# EAGLE board medi_charlie_10x10_with_header_groudplane (EAGLE 6.2)

Size 76.2 x 76.2 mm. Coordinates in mm from the lower left corner, seen from the top.
Outline: 0,0 0,76.2 76.2,76.2 76.2,0 0,0
Copper layers (1*16): Top 0.035mm / dielectric 1.5mm / Bottom 0.035mm
Design rules: minimum track width 10mil, minimum drill 20mil, track to track 8mil, track to pad 8mil, pad to pad 8mil, via to via 8mil, smd to smd 8mil, copper to edge 10mil, drill to drill 8mil, minimum pad ring 12mil, minimum via ring 10mil, stop-mask expansion 4mil, vias tented up to drill 25mil, thermal gap 10mil
Holes 3.2 mm at 7.62,7.62 7.62,68.58 68.58,7.62 68.58,68.58

## Footprints (pad centres in the part's own frame; a part is rotated, then mirrored left to right if it is on the bottom)
LED3MM = drill 0.813 pad 1.88: A -1.27,0; K 1.27,0
DIL20 = drill 0.813 long: 1 -11.43,-3.81; 2 -8.89,-3.81; 3 -6.35,-3.81; 4 -3.81,-3.81; 5 -1.27,-3.81; 6 1.27,-3.81; 7 3.81,-3.81; 8 6.35,-3.81; 9 8.89,-3.81; 10 11.43,-3.81; 11 11.43,3.81; 12 8.89,3.81; 13 6.35,3.81; 14 3.81,3.81; 15 1.27,3.81; 16 -1.27,3.81; 17 -3.81,3.81; 18 -6.35,3.81; 19 -8.89,3.81; 20 -11.43,3.81
1X06_LOCK = drill 1.016 pad 1.88: 1 0,0; 2 2.54,-0.254; 3 5.08,0; 4 7.62,-0.254; 5 10.16,0; 6 12.7,-0.254
R-5 = drill 0.813 pad 1.6 octagon: 1 -2.54,0; 2 2.54,0
C025-025X050 = drill 0.813 octagon: 1 -1.27,0; 2 1.27,0
SOIC14 = smd 0.61 x 2.21: 1 -3.81,-2.603; 2 -2.54,-2.603; 3 -1.27,-2.603; 4 0,-2.603; 5 1.27,-2.603; 6 2.54,-2.603; 7 3.81,-2.603; 8 3.81,2.603; 9 2.54,2.603; 10 1.27,2.603; 11 0,2.603; 12 -1.27,2.603; 13 -2.54,2.603; 14 -3.81,2.603
DIL14 = drill 0.813 long: 1 -7.62,-3.81; 2 -5.08,-3.81; 3 -2.54,-3.81; 4 0,-3.81; 5 2.54,-3.81; 6 5.08,-3.81; 7 7.62,-3.81; 8 7.62,3.81; 9 5.08,3.81; 10 2.54,3.81; 11 0,3.81; 12 -2.54,3.81; 13 -5.08,3.81; 14 -7.62,3.81
SOIC20S = smd 0.6 x 1.5: 1 -5.715,-5; 2 -4.445,-5; 3 -3.175,-5; 4 -1.905,-5; 5 -0.635,-5; 6 0.635,-5; 7 1.905,-5; 8 3.175,-5; 9 4.445,-5; 10 5.715,-5; 11 5.715,5; 12 4.445,5; 13 3.175,5; 14 1.905,5; 15 0.635,5; 16 -0.635,5; 17 -1.905,5; 18 -3.175,5; 19 -4.445,5; 20 -5.715,5
DIL28-3 = drill 0.813 long: 1 -16.51,-3.81; 2 -13.97,-3.81; 3 -11.43,-3.81; 4 -8.89,-3.81; 5 -6.35,-3.81; 6 -3.81,-3.81; 7 -1.27,-3.81; 8 1.27,-3.81; 9 3.81,-3.81; 10 6.35,-3.81; 11 8.89,-3.81; 12 11.43,-3.81; 13 13.97,-3.81; 14 16.51,-3.81; 15 16.51,3.81; 16 13.97,3.81; 17 11.43,3.81; 18 8.89,3.81; 19 6.35,3.81; 20 3.81,3.81; 21 1.27,3.81; 22 -1.27,3.81; 23 -3.81,3.81; 24 -6.35,3.81; 25 -8.89,3.81; 26 -11.43,3.81; 27 -13.97,3.81; 28 -16.51,3.81
1X02_LONGPADS = drill 1.016 pad 1.88 long: 1 0,0; 2 2.54,0
1X02 = drill 1.016 pad 1.88: 1 0,0; 2 2.54,0
1X11_LOCK = drill 1.016 pad 1.88: 1 0,0.127; 2 2.54,-0.127; 3 5.08,0.127; 4 7.62,-0.127; 5 10.16,0.127; 6 12.7,-0.127; 7 15.24,0.127; 8 17.78,-0.127; 9 20.32,0.127; 10 22.86,-0.127; 11 25.4,0.127

## Placement (x,y rotation side)
00  [LED3MM]  3.81,3.81 0 top
01  [LED3MM]  11.43,3.81 0 top
02  [LED3MM]  19.05,3.81 0 top
03  [LED3MM]  26.67,3.81 0 top
04  [LED3MM]  34.29,3.81 0 top
05  [LED3MM]  41.91,3.81 0 top
06  [LED3MM]  49.53,3.81 0 top
07  [LED3MM]  57.15,3.81 0 top
08  [LED3MM]  64.77,3.81 0 top
09  [LED3MM]  72.39,3.81 0 top
10  [LED3MM]  3.81,11.43 0 top
11  [LED3MM]  11.43,11.43 0 top
12  [LED3MM]  19.05,11.43 0 top
13  [LED3MM]  26.67,11.43 0 top
14  [LED3MM]  34.29,11.43 0 top
15  [LED3MM]  41.91,11.43 0 top
16  [LED3MM]  49.53,11.43 0 top
17  [LED3MM]  57.15,11.43 0 top
18  [LED3MM]  64.77,11.43 0 top
19  [LED3MM]  72.39,11.43 0 top
20  [LED3MM]  3.81,19.05 0 top
21  [LED3MM]  11.43,19.05 0 top
22  [LED3MM]  19.05,19.05 0 top
23  [LED3MM]  26.67,19.05 0 top
24  [LED3MM]  34.29,19.05 0 top
25  [LED3MM]  41.91,19.05 0 top
26  [LED3MM]  49.53,19.05 0 top
27  [LED3MM]  57.15,19.05 0 top
28  [LED3MM]  64.77,19.05 0 top
29  [LED3MM]  72.39,19.05 0 top
30  [LED3MM]  3.81,26.67 0 top
31  [LED3MM]  11.43,26.67 0 top
32  [LED3MM]  19.05,26.67 0 top
33  [LED3MM]  26.67,26.67 0 top
34  [LED3MM]  34.29,26.67 0 top
35  [LED3MM]  41.91,26.67 0 top
36  [LED3MM]  49.53,26.67 0 top
37  [LED3MM]  57.15,26.67 0 top
38  [LED3MM]  64.77,26.67 0 top
39  [LED3MM]  72.39,26.67 0 top
40  [LED3MM]  3.81,34.29 0 top
41  [LED3MM]  11.43,34.29 0 top
42  [LED3MM]  19.05,34.29 0 top
43  [LED3MM]  26.67,34.29 0 top
44  [LED3MM]  34.29,34.29 0 top
45  [LED3MM]  41.91,34.29 0 top
46  [LED3MM]  49.53,34.29 0 top
47  [LED3MM]  57.15,34.29 0 top
48  [LED3MM]  64.77,34.29 0 top
49  [LED3MM]  72.39,34.29 0 top
50  [LED3MM]  3.81,41.91 0 top
51  [LED3MM]  11.43,41.91 0 top
52  [LED3MM]  19.05,41.91 0 top
53  [LED3MM]  26.67,41.91 0 top
54  [LED3MM]  34.29,41.91 0 top
55  [LED3MM]  41.91,41.91 0 top
56  [LED3MM]  49.53,41.91 0 top
57  [LED3MM]  57.15,41.91 0 top
58  [LED3MM]  64.77,41.91 0 top
59  [LED3MM]  72.39,41.91 0 top
60  [LED3MM]  3.81,49.53 0 top
61  [LED3MM]  11.43,49.53 0 top
62  [LED3MM]  19.05,49.53 0 top
63  [LED3MM]  26.67,49.53 0 top
64  [LED3MM]  34.29,49.53 0 top
65  [LED3MM]  41.91,49.53 0 top
66  [LED3MM]  49.53,49.53 0 top
67  [LED3MM]  57.15,49.53 0 top
68  [LED3MM]  64.77,49.53 0 top
69  [LED3MM]  72.39,49.53 0 top
70  [LED3MM]  3.81,57.15 0 top
71  [LED3MM]  11.43,57.15 0 top
72  [LED3MM]  19.05,57.15 0 top
73  [LED3MM]  26.67,57.15 0 top
74  [LED3MM]  34.29,57.15 0 top
75  [LED3MM]  41.91,57.15 0 top
76  [LED3MM]  49.53,57.15 0 top
77  [LED3MM]  57.15,57.15 0 top
78  [LED3MM]  64.77,57.15 0 top
79  [LED3MM]  72.39,57.15 0 top
80  [LED3MM]  3.81,64.77 0 top
81  [LED3MM]  11.43,64.77 0 top
82  [LED3MM]  19.05,64.77 0 top
83  [LED3MM]  26.67,64.77 0 top
84  [LED3MM]  34.29,64.77 0 top
85  [LED3MM]  41.91,64.77 0 top
86  [LED3MM]  49.53,64.77 0 top
87  [LED3MM]  57.15,64.77 0 top
88  [LED3MM]  64.77,64.77 0 top
89  [LED3MM]  72.39,64.77 0 top
90  [LED3MM]  3.81,72.39 0 top
91  [LED3MM]  11.43,72.39 0 top
92  [LED3MM]  19.05,72.39 0 top
93  [LED3MM]  26.67,72.39 0 top
94  [LED3MM]  34.29,72.39 0 top
95  [LED3MM]  41.91,72.39 0 top
96  [LED3MM]  49.53,72.39 0 top
97  [LED3MM]  57.15,72.39 0 top
98  [LED3MM]  64.77,72.39 0 top
99  [LED3MM]  72.39,72.39 0 top
H1  [DIL20]  26.67,49.53 0 bottom
H2  [1X06_LOCK]  12.7,68.58 0 top
H3  [1X06_LOCK]  50.8,68.58 0 top
H4  [R-5]  11.43,60.96 0 top
H5  [R-5]  64.77,60.96 0 top
H6  [C025-025X050]  3.81,53.34 180 top
H7  [C025-025X050]  3.81,38.1 180 top
H8  [C025-025X050]  3.81,22.86 180 top
H12  [SOIC14]  57.15,19.05 0 bottom
H13  [DIL14]  22.86,19.05 0 bottom
H15  [SOIC20S]  57.15,49.53 0 bottom
H16  [DIL28-3]  31.75,34.29 0 bottom
H17  [1X02_LONGPADS]  13.97,7.62 0 top
H19  [1X02]  59.69,7.62 0 top
H21  [1X06_LOCK]  31.75,68.58 0 top
H22  [1X11_LOCK]  25.4,7.62 0 top

## Library data of the parts
00 01-09 10-99 H2 H3 H17 H19 H21 H22 = SparkFun
H1 H13 H16 = 40xx
H4 H5 = discrete
H6-H8 = ref-packages
H12 = avr-5-4.16
H15 = atmel

## Nets
D: 00.A 11.A 22.A 33.A 44.A 55.A 66.A 77.A 88.A 99.A H1.5 H12.5 H13.5 H15.5 H16.13 H22.11
GROUND: H1.20 H2.3 H3.3 H6.2 H7.2 H8.2 H12.1 H13.1 H15.20 H16.7 H16.20 H16.21 H17.1 H21.3
S0: 00.K 01.A 02.A 03.A 04.A 05.A 06.A 07.A 08.A 09.A 10.K 20.K 30.K 40.K 50.K 60.K 70.K 80.K 90.K H1.12 H12.13 H13.13 H15.12 H16.14 H22.1
S1: 01.K 10.A 11.K 12.A 13.A 14.A 15.A 16.A 17.A 18.A 19.A 21.K 31.K 41.K 51.K 61.K 71.K 81.K 91.K H1.13 H12.12 H13.12 H15.13 H16.15 H22.2
S2: 02.K 12.K 20.A 21.A 22.K 23.A 24.A 25.A 26.A 27.A 28.A 29.A 32.K 42.K 52.K 62.K 72.K 82.K 92.K H1.14 H12.11 H13.11 H15.14 H16.16 H22.3
S3: 03.K 13.K 23.K 30.A 31.A 32.A 33.K 34.A 35.A 36.A 37.A 38.A 39.A 43.K 53.K 63.K 73.K 83.K 93.K H1.15 H12.10 H13.10 H15.15 H16.9 H22.4
S4: 04.K 14.K 24.K 34.K 40.A 41.A 42.A 43.A 44.K 45.A 46.A 47.A 48.A 49.A 54.K 64.K 74.K 84.K 94.K H1.16 H2.5 H12.9 H13.9 H15.16 H16.10 H22.5
S5: 05.K 15.K 25.K 35.K 45.K 50.A 51.A 52.A 53.A 54.A 55.K 56.A 57.A 58.A 59.A 65.K 75.K 85.K 95.K H1.6 H2.2 H12.8 H13.8 H15.6 H16.4 H22.6
S6: 06.K 16.K 26.K 36.K 46.K 56.K 60.A 61.A 62.A 63.A 64.A 65.A 66.K 67.A 68.A 69.A 76.K 86.K 96.K H1.7 H2.6 H12.7 H13.7 H15.7 H16.5 H22.7
S7: 07.K 17.K 27.K 37.K 47.K 57.K 67.K 70.A 71.A 72.A 73.A 74.A 75.A 76.A 77.K 78.A 79.A 87.K 97.K H1.8 H12.6 H13.6 H15.8 H16.6 H22.8
S8: 08.K 18.K 28.K 38.K 48.K 58.K 68.K 78.K 80.A 81.A 82.A 83.A 84.A 85.A 86.A 87.A 88.K 89.A 98.K H1.9 H12.2 H13.2 H15.9 H16.11 H22.9
S9: 09.K 19.K 29.K 39.K 49.K 59.K 69.K 79.K 89.K 90.A 91.A 92.A 93.A 94.A 95.A 96.A 97.A 98.A 99.K H1.11 H12.3 H13.3 H15.11 H16.12 H22.10
S$1: H2.4 H4.2 H12.4 H13.4
S$2: H1.18 H3.2 H15.18 H16.18
S$5: H1.2 H15.2 H16.2 H19.2 H21.4
S$6: H1.3 H15.3 H16.3 H19.1 H21.5
S$7: H1.17 H3.6 H15.17 H16.17
S$8: H1.1 H3.4 H5.2 H15.1 H16.1
S$9: H1.19 H3.5 H15.19 H16.19
S$10: H1.4 H15.4
S$12: H1.10 H2.1 H3.1 H4.1 H5.1 H6.1 H7.1 H8.1 H12.14 H13.14 H15.10 H16.8 H16.22 H17.2 H21.1

## Tracks (layer width: path | path; a pad name or v marks a point on that pad's centre or on a via)
D  (15 unrouted)
GROUND  (13 unrouted)
S0  (24 unrouted)
S1  (24 unrouted)
S2  (24 unrouted)
S3  (24 unrouted)
S4  (25 unrouted)
S5  (25 unrouted)
S6  (25 unrouted)
S7  (24 unrouted)
S8  (24 unrouted)
S9  (24 unrouted)
S$1  (3 unrouted)
S$2  (3 unrouted)
S$5  (4 unrouted)
S$6  (4 unrouted)
S$7  (3 unrouted)
S$8  (4 unrouted)
S$9  (3 unrouted)
S$10  (1 unrouted)
S$12  (14 unrouted)

## Text on the board
_tsilk: ISP (Tiny24) | RS232 | ISP (Mega, Tiny2313) | + - | K | K | K | + - | 1Ok | 1Ok | AtTiny 2313 | AtMega 168/328 | AtTiny 24/44/84 | Drive Lines 1 ... 11 | +3v | Power | TX | RX | + - | + -